# Altium PCB RGB_SL.PcbDoc (part 2 of 2)
Units mm, origin at the board's own origin, x right, y up, seen from the top; angles counter-clockwise.
Board outline 50 x 50 mm, 2 copper layers (Top Layer, Bottom Layer); 48 components, 35 nets, 139 pads, 27 vias.
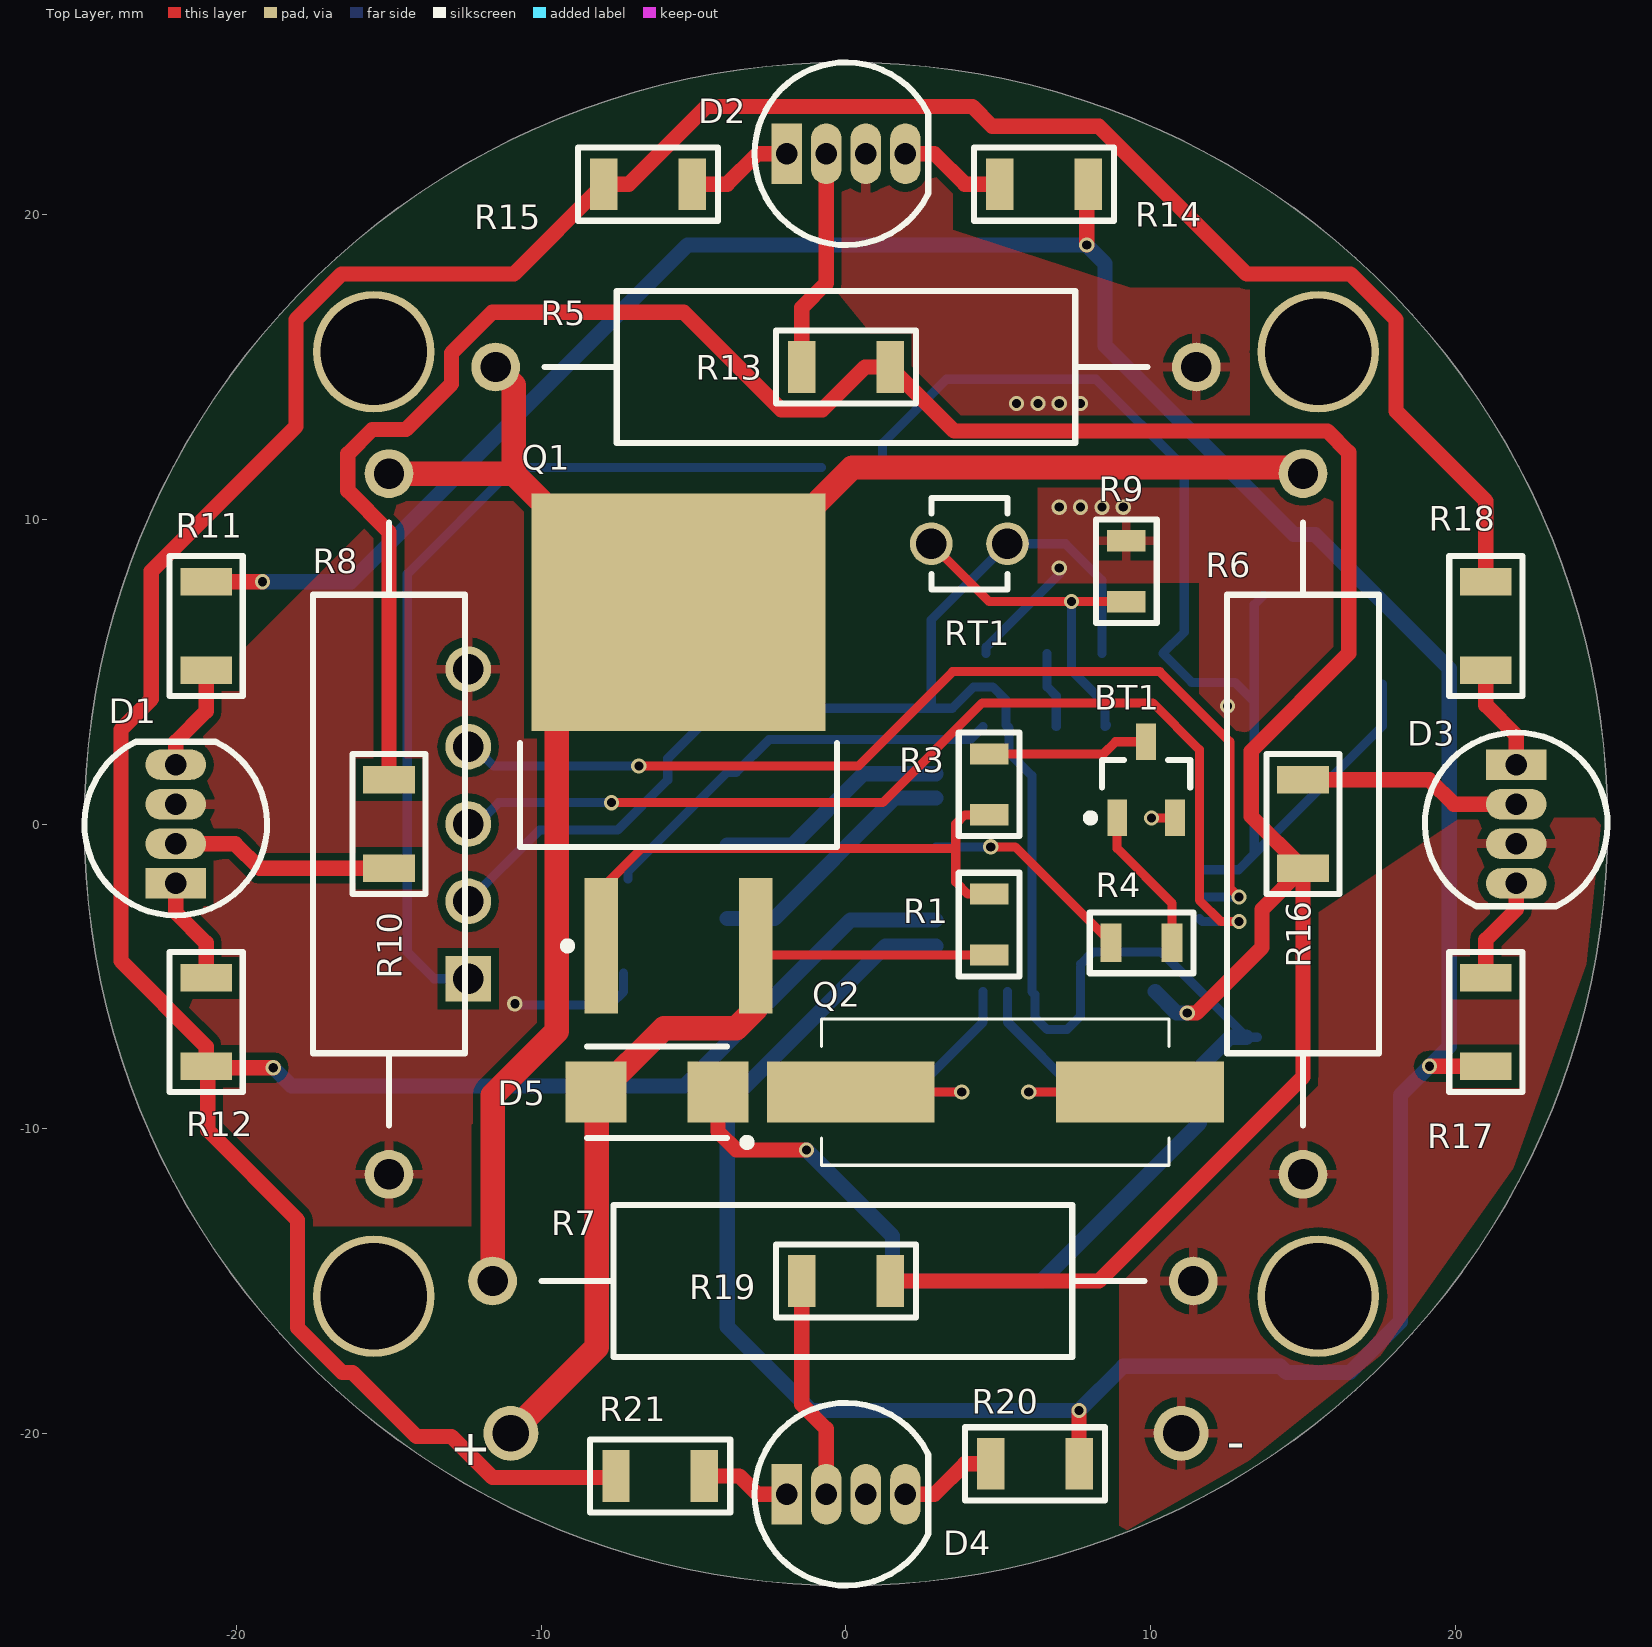
[diagram p0: Top Layer view]

## Silkscreen, mask and mechanical layers (free items; w line width, h text height) (continued)
Board Outline: (continued)
  circle w0.15: c0,0 r25
Mechanical Drawings:
  text ".Project" at -21,46.3 h3
  text "Mechanical Drawing" at -24.742,41.8 h3
  text ".VariantName" at -9.747,36.8 h3
  text "Units: mm / Drill dia: /    A - 3.5  /    B - 1  /    C -  0.7  / Components placed symmetrically" at -31.1,-43.9 h1.5
Mechanical 29:
  text ".Project" at -21.1,38.425 h3
  text "Assembly Top" at -16.025,33.45 h3
  text ".VariantName" at -8.475,28 h3
Mechanical 30:
  text ".Project" at 23.125,38.225 h3
  text "Assembly Bottom" at 22.4,33.3 h3
  text ".VariantName" at 10.8,27.8 h3

## Dimensions
5.3,9.2 to 20.1,28.4 on Comments Top
0,0 to 5.3,9.2 on Comments Top
-11.075,-20 to -27.375,-13.4 on Comments Top
22,-1.95 to 26.975,-15.1 on Comments Top
-12.4,-5.08 to -27.375,-13.4 on Comments Top
-15.5,15.5 to -24.1,22.9 on Comments Top
0,0 to 15,11.5 on Comments Top
0,0 to -11.075,-20 on Comments Top
0,0 to 22,-1.95 on Comments Top
0,0 to 22,-1.95 on Comments Top
0,0 to 22.4,17.9 on Comments Top
0,0 to -12.4,-5.08 on Comments Top
0,0 to -15.5,15.5 on Comments Top
0,0 to -15.5,15.5 on Comments Top